# EAGLE board zdroj_schema_1 (EAGLE 7.7.0)

Size 171.12 x 129.53 mm. Coordinates in mm from the lower left corner, seen from the top.
Outline: 0,0 171.12,0 171.12,129.53 0,129.53 0,0
Copper layers (1*16): Top 0.035mm / dielectric 1.5mm / Bottom 0.035mm
Design rules "default": minimum track width 10mil, minimum drill 24mil, track to track 8mil, track to pad 8mil, pad to pad 8mil, via to via 8mil, smd to smd 8mil, copper to edge 40mil, drill to drill 8mil, minimum pad ring 10mil, minimum via ring 8mil, stop-mask expansion 4mil, vias tented up to drill 0mil, thermal gap 10mil

## Footprints (pad centres in the part's own frame; a part is rotated, then mirrored left to right if it is on the bottom)
DBS = smd 1.7 x 1.9: + -2.55,-4.5; - 2.55,-4.5; AC1 -2.55,4.5; AC2 2.55,4.5
153CLV-0605 = smd 3.5 x 1.6: + 2.7,0; - -2.7,0
C0805 = smd 1.3 x 1.5: 1 -0.95,0; 2 0.95,0
SOT23 = smd 1 x 1.4: 1 -0.95,-1.1; 2 0.95,-1.1; 3 0,1.1
TE5 = drill 1.016 long: 1 -2.54,0; 2 2.54,0
SOT89 = smd 1 x 1.5: 1 -1.499,-1.981; 3 1.499,-1.981 | smd 1 x 2: 2 0,-1.727 | smd 2.2 x 3.7: 2@1 0,0.94
SO08 = smd 0.6 x 2.2: 1 -1.905,-2.6; 2 -0.635,-2.6; 3 0.635,-2.6; 4 1.905,-2.6; 5 1.905,2.6; 6 0.635,2.6; 7 -0.635,2.6; 8 -1.905,2.6
TO263-5 = smd 1.067 x 2.159: 1 -3.404,-5.791; 2 -1.702,-5.791; 3 0,-5.791; 4 1.702,-5.791; 5 3.404,-5.791 | smd 10.8 x 10.41: 6 0,2.54
SOT-23 = smd 0.787 x 0.889: 1 -0.991,-1.016; 2 0.94,-1.016; 3 -0.025,1.016
SM-L15B = smd 1.1 x 1.5: 1 -2.95,-1.65; 2 2.95,1.75
LED_1206 = smd 1.6 x 1.803: A -1.422,0; C 1.422,0
2,54/1,0 = drill 1.016 pad 2.54 octagon: 1 0,0
M0805 = smd 1.3 x 1.6: 1 -0.95,0; 2 0.95,0
PC25 = smd 2.2 x 0.8: 4 0,1.65 | smd 0.9 x 1.4: A -1.35,-1.9; E 1.35,-1.9; S 0,-1.9
22-23-2021 = drill 1 long: 1 -1.27,0; 2 1.27,0

## Placement (x,y rotation side)
B1  DBS104G  [DBS]  -35.56,6.35 0 top  (outside the outline)
C4  [153CLV-0605]  -27.94,30.48 0 top  (outside the outline)
C5  [C0805]  -38.1,46.99 0 top  (outside the outline)
C6  [C0805]  -43.18,46.99 0 top  (outside the outline)
C7  [C0805]  -48.26,46.99 0 top  (outside the outline)
C8  [C0805]  -53.34,46.99 0 top  (outside the outline)
C9  [C0805]  -15.24,52.07 0 top  (outside the outline)
C10  [153CLV-0605]  -38.1,30.48 0 top  (outside the outline)
D3  BAT54  [SOT23]  -16.51,40.64 0 top  (outside the outline)
F1  [TE5]  -34.29,39.37 0 top  (outside the outline)
IC1  78L05F  [SOT89]  -52.07,21.59 0 top  (outside the outline)
IC2  LM358D  [SO08]  -17.78,31.75 0 top  (outside the outline)
IC3  LM2596S  [TO263-5]  -20.32,7.62 0 top  (outside the outline)
IC4  TL431ACDBZ  [SOT-23]  -76.2,-16.51 0 top  (outside the outline)
L1  [SM-L15B]  -43.18,39.37 0 top  (outside the outline)
LED1  [LED_1206]  -50.8,38.1 0 top  (outside the outline)
LED2  [LED_1206]  -16.51,46.99 0 top  (outside the outline)
LED3  [LED_1206]  -22.86,46.99 0 top  (outside the outline)
PAD1  [2,54/1,0]  -66.04,-31.75 0 top  (outside the outline)
PAD2  [2,54/1,0]  -66.04,-57.15 0 top  (outside the outline)
R1  [M0805]  -20.32,52.07 0 top  (outside the outline)
R2  [M0805]  -25.4,52.07 0 top  (outside the outline)
R3  [PC25]  -21.59,40.64 0 top  (outside the outline)
R4  [PC25]  -26.67,40.64 0 top  (outside the outline)
R5  [M0805]  -30.48,52.07 0 top  (outside the outline)
R6  [M0805]  -35.56,52.07 0 top  (outside the outline)
R7  [M0805]  -40.64,52.07 0 top  (outside the outline)
R8  [M0805]  -45.72,52.07 0 top  (outside the outline)
R9  [M0805]  -50.8,52.07 0 top  (outside the outline)
R10  [M0805]  -27.94,46.99 0 top  (outside the outline)
X1  22-23-2021  [22-23-2021]  -69.85,-77.47 0 top  (outside the outline)
X2  22-23-2021  [22-23-2021]  -69.85,-92.71 0 top  (outside the outline)

## Library data of the parts
B1 = rectifier
C4 C10 R1 R2 R5-R10 = rcl
C5-C9 = eagle-ltspice; SPICEMODEL: NONE; SPICEPREFIX: C
D3 = diode
F1 = fuse; OC_FARNELL: unknown; OC_NEWARK: unknown
IC1 IC2 = linear
IC3 = national-semiconductor; MF: NATIONAL SEMICONDUCTOR; MPN: LM2596S-ADJ/NOPB; OC_FARNELL: 9494367; OC_NEWARK: 41K3842
IC4 = TL431; MF: Texas Instruments; MPN: TL431ACDBZ
L1 = inductor-neosid; OC_FARNELL: unknown; OC_NEWARK: unknown
LED1-LED3 = eagle-ltspice; SPICEMODEL: NONE; SPICEPREFIX: D; SPICETYPE: diode
PAD1 PAD2 = wirepad
R3 R4 = pot-vitrohm; MF: CLAROSTAT; MPN: 308NPC25KS; OC_FARNELL: 1440998; OC_NEWARK: 03F7518
X1 X2 = con-molex; MF: MOLEX; MPN: 22-23-2021; OC_FARNELL: 1462926; OC_NEWARK: 25C3832

## Nets
GND: B1.- C4.- C5.2 C6.2 C7.2 C9.2 C10.- D3.1 IC1.2 IC2.4 IC3.3 IC4.3 PAD2.1 R4.A R5.1 R7.2 R8.2
N$1: F1.2 X1.2
N$2: B1.AC1 F1.1
N$3: B1.AC2 X1.1
N$5: C8.1 IC2.1 LED1.A
N$6: B1.+ C4.+ C5.1 IC1.3 IC3.1
N$7: C6.1 IC1.1 IC2.8 R1.1 R9.2
N$8: D3.3 IC3.2 L1.1
N$9: C7.1 IC4.1 IC4.2 R1.2 R2.1
N$10: R2.2 R4.E
N$11: C8.2 IC2.2 R4.S R6.2
N$12: C9.1 C10.+ L1.2 R3.E R3.S X2.1
N$13: IC2.6 R6.1 R7.1
N$14: LED2.A R9.1
N$15: IC2.7 LED2.C LED3.A
N$16: LED3.C R10.1
N$17: IC3.4 LED1.C R3.A R5.2
N$18: IC2.3 IC2.5 R8.1 R10.2 X2.2
N$19: IC3.5 PAD1.1

## Tracks (layer width: path | path; a pad name or v marks a point on that pad's centre or on a via)
GND  (16 unrouted)
N$1  (1 unrouted)
N$2  (1 unrouted)
N$3  (1 unrouted)
N$5  (2 unrouted)
N$6  (4 unrouted)
N$7  (4 unrouted)
N$8  (2 unrouted)
N$9  (4 unrouted)
N$10  (1 unrouted)
N$11  (3 unrouted)
N$12  (5 unrouted)
N$13  (2 unrouted)
N$14  (1 unrouted)
N$15  (2 unrouted)
N$16  (1 unrouted)
N$17  (3 unrouted)
N$18  (4 unrouted)
N$19  (1 unrouted)